# EAGLE board BusPirate-SMPS (EAGLE 5.07)
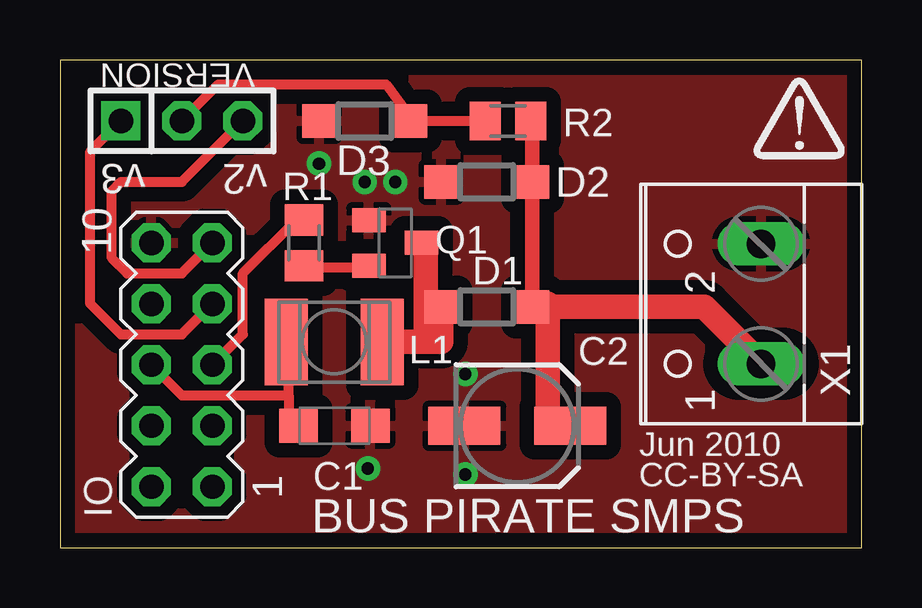
[diagram p0: board, top side]
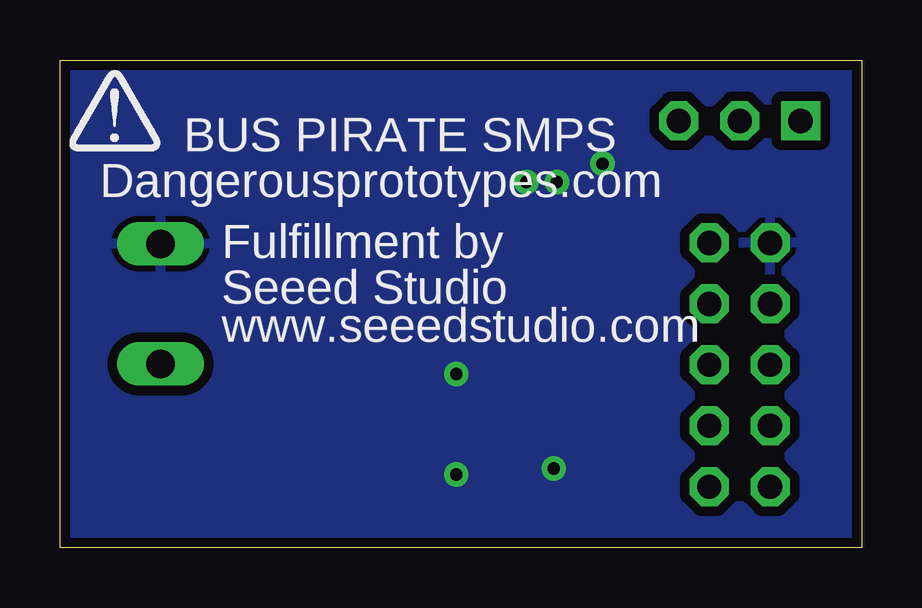
[diagram p1: board, bottom side, seen from below]

Size 33.4 x 20.32 mm. Coordinates in mm from the lower left corner, seen from the top.
Outline: 0,20.32 0,0 33.4,0 33.4,20.32 0,20.32
Copper layers (1*16): Top 0.035mm / dielectric 1.5mm / Bottom 0.035mm
Design rules "SparkFun": minimum track width 8mil, minimum drill 20mil, track to track 8mil, track to pad 8mil, pad to pad 8mil, via to via 8mil, smd to smd 8mil, copper to edge 10mil, drill to drill 8mil, minimum pad ring 12mil, minimum via ring 10mil, stop-mask expansion 4mil, vias tented up to drill 25mil, thermal gap 10mil

## Footprints (pad centres in the part's own frame; a part is rotated, then mirrored left to right if it is on the bottom)
SMC_A = smd 1.6 x 1.4: + -1.5,0; - 1.5,0
SANYO-OSCON_SMD_B6 = smd 3 x 1.6: + 2.2,0; - -2.2,0
SOD123 = smd 1.4 x 1.4: A 1.9,0; C -1.9,0
MA05-2 = drill 1.016 octagon: 1 -5.08,-1.27; 2 -5.08,1.27; 3 -2.54,-1.27; 4 -2.54,1.27; 5 0,-1.27; 6 0,1.27; 7 2.54,-1.27; 8 2.54,1.27; 9 5.08,-1.27; 10 5.08,1.27
1X03 = drill 1.016 square: 1 -2.54,0 | drill 1.016 octagon: 2 0,0; 3 2.54,0
L4532P = smd 1.8 x 3.6: 1 -2,0; 2 2,0
SOT23-EBC = smd 1 x 1.4: B 0.95,-1.1; C 0,1.1; E -0.95,-1.1
M0805 = smd 1.3 x 1.6: 1 -0.95,0; 2 0.95,0
W237-102 = drill 1.194 long: 1 -2.5,-1.27; 2 2.5,-1.27

## Placement (x,y rotation side)
C1  [SMC_A]  11.43,5.08 0 top
C2  [SANYO-OSCON_SMD_B6]  19.05,5.08 0 top
D1  [SOD123]  17.78,10.03 180 top
D2  [SOD123]  17.78,15.24 180 top
D3  [SOD123]  12.7,17.78 180 top
IO  [MA05-2]  5.08,7.62 90 top
JP1  [1X03]  5.08,17.78 0 top
L1  [L4532P]  11.43,8.57 180 top
Q1  [SOT23-EBC]  13.97,12.7 270 top
R1  10K  [M0805]  10.16,12.7 270 top
R2  39K  [M0805]  18.67,17.78 0 top
U$1  [DP-LOGO_TOP]  28.89,16.19 0 top
U$2  [DP-LOGO-BOTTOM]  29.21,16.51 0 top
X1  [W237-102]  27.94,10.16 90 top

## Library data of the parts
C1 C2 L1 R1 R2 = rcl
D1-D3 = diode
IO = con-lstb
JP1 = pinhead-2
Q1 = transistor
U$1 U$2 = DP-logo
X1 = con-wago-500

## Nets
5V: IO.8
$N4: Q1.B R1.2
FB: D3.C JP1.2 R2.1
GND: C1.- C2.- D2.A D3.A IO.10 Q1.E X1.2
MCLR: IO.2
N$2: D1.A L1.1 Q1.C
PGC: IO.4
PGD: IO.3
PWM: IO.5 R1.1
V2G0ADC: IO.9 JP1.3
V3ADC: IO.7 JP1.1
VPP: C2.+ D1.C D2.C R2.2 X1.1
VPPEN: IO.1
VTARGET: C1.+ IO.6 L1.2

## Tracks (layer width: path | path; a pad name or v marks a point on that pad's centre or on a via)
$N4
  Top 0.406: R1.2 10.16,11.68 12.8,11.68 Q1.B
FB
  Top 0.406: JP1.2 6.6,19.3 13.59,19.3 14.46,18.15 | R2.1 14.73,17.78 14.46,18.15 | D3.C 14.46,17.78 14.46,18.15
GND  (via drill 0.51)
  other vias: 12.7,15.24 13.97,15.24 16.89,7.24 16.89,3.05 12.83,3.3 10.79,16
  pour Top (isolate 0.61): 33.02,20.32 33.02,0 0,0 0,20.32
  pour Bottom (isolate 0.406): 0,20.32 33.02,20.32 33.02,0 0,0
N$2
  Top 0.406: 15.24,12.53 Q1.C
  Top 1.016: L1.1 15.24,8.57 | 15.24,8.57 15.88,8.57 D1.A | 15.24,8.57 15.24,12.53
PWM
  Top 0.406: IO.5 7.62,8.89 7.62,11.43 9.84,13.65 R1.1
V2G0ADC
  Top 0.406: IO.9 5.08,11.43 2.79,11.43 2.16,12.06 2.16,14.86 2.54,15.24 5.08,15.24 JP1.3
V3ADC
  Top 0.406: JP1.1 1.27,16.51 1.27,10.16 2.54,8.89 5.08,8.89 IO.7
VPP
  Top 0.61: R2.2 19.68,17.78 D2.C D1.C
  Top 1.016: C2.+ 20.32,5.33 20.32,10.16 19.68,10.16 D1.C 26.84,10.03 X1.1
VTARGET
  Top 0.406: IO.6 5.08,6.35 9.53,6.35 | 8.89,8.89 L1.2 9.53,8.79 9.53,6.35 | 9.53,6.35 9.53,5.49 C1.+

## Text on the board
tNames: VERSION | v3 | v2 | Jun 2010 | CC-BY-SA | BUS PIRATE SMPS
bNames: BUS PIRATE SMPS | Dangerousprototypes.com | Fulfillment by | Seeed Studio | www.seeedstudio.com
tValues: RA0 | RA1 | GND | V+ | GND | RB15 | MCLR | V+ | GND | PGD3 | PGC3
Reference: BUS PIRATE SMPS | Ian Lesnet 2010 CC-BY-SA | http://dangerousprototypes.com